# EAGLE board mixer 4x1 PANEL v1 (EAGLE 7.7.0)
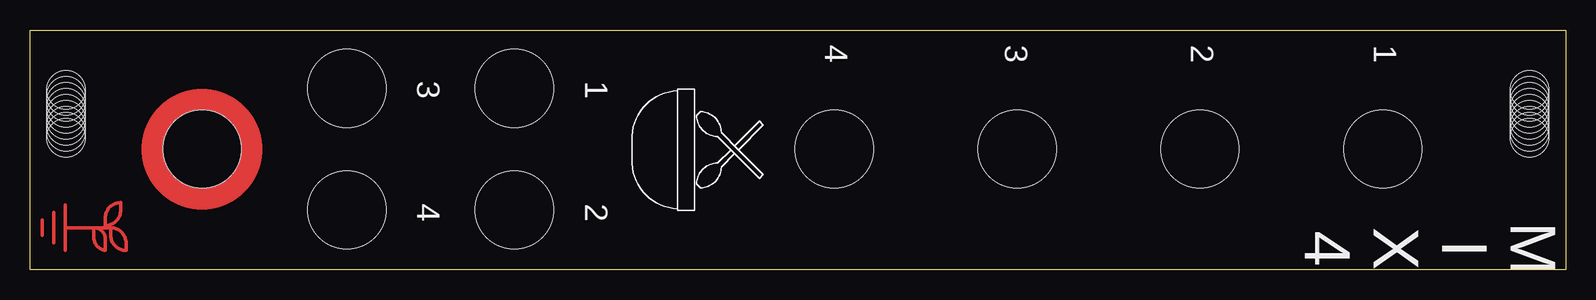
[diagram p0: board, top side]
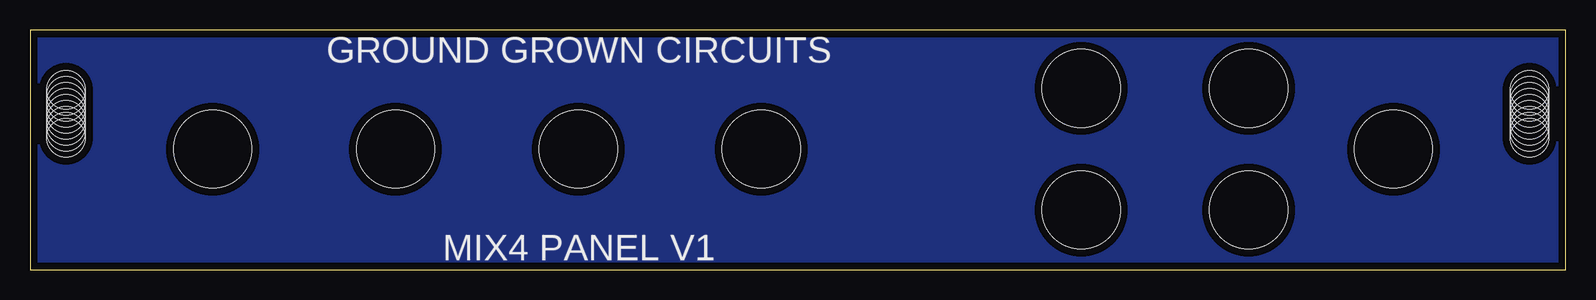
[diagram p1: board, bottom side, seen from below]

Size 128 x 20 mm. Coordinates in mm from the lower left corner, seen from the top.
Outline: 0,0 0,20 128,20 128,0 0,0
Copper layers (1*16): Top 0.035mm / dielectric 1.5mm / Bottom 0.035mm
Design rules "SparkFun": minimum track width 8mil, minimum drill 20mil, track to track 8mil, track to pad 8mil, pad to pad 8mil, via to via 8mil, smd to smd 8mil, copper to edge 8mil, drill to drill 8mil, minimum pad ring 12mil, minimum via ring 10mil, stop-mask expansion 4mil, vias tented up to drill 20mil, thermal gap 10mil

## Footprints (pad centres in the part's own frame; a part is rotated, then mirrored left to right if it is on the bottom)
MOUNT_DRILL = hole 3.2: 3,9; 3,8.5; 3,8; 3,7.5; 3,7; 3,6.5; 3,6; 3,5.5; 3,5
JACK_DRILL = hole 6.5: 0,0
JACK_DRILL_COPPER_SM = hole 6.5: 0,0

## Placement (x,y rotation side)
E$1  [LOGO_SMALL_COPPER]  3,3.5 270 top
E$2  [MOUNT_DRILL]  128,20 180 top
E$3  [MOUNT_DRILL]  0,20 180 bottom
E$4  [MIXING_BOWL]  55.25,10 270 top
IN1  [JACK_DRILL]  40.38,15.13 90 top
IN2  [JACK_DRILL]  40.38,4.97 90 top
IN3  [JACK_DRILL]  26.41,15.13 90 top
IN4  [JACK_DRILL]  26.41,4.97 90 top
LVL1  [JACK_DRILL]  112.77,10.05 180 top
LVL2  [JACK_DRILL]  97.53,10.05 180 top
LVL3  [JACK_DRILL]  82.29,10.05 180 top
LVL4  [JACK_DRILL]  67.05,10.05 180 top
OUT  [JACK_DRILL_COPPER_SM]  14.35,10.05 180 top

## Library data of the parts
E$1-E$4 IN1-IN4 OUT = GroundGrownCircuits
LVL1-LVL4 = GroundGrownCircuits; PROD_ID: RES-09177

## Tracks (layer width: path | path; a pad name or v marks a point on that pad's centre or on a via)
S$1
  pour Bottom (isolate 0.61): 0,0 128,0 128,20 0,20

## Text on the board
tPlace: 4 | 3 | 2 | 1 | 3 | 1 | 4 | 2 | M / I / X / 4
bPlace: GROUND GROWN CIRCUITS | MIX4 PANEL V1